# Altium PCB dalibor-display.PcbDoc
Units mm, origin at the board's own origin, x right, y up, seen from the top; angles counter-clockwise.
Board outline 120 x 75 mm, 2 copper layers (Top Layer, Bottom Layer), stack 1.471 mm thick; 22 components, 46 nets, 114 pads, 19 vias.
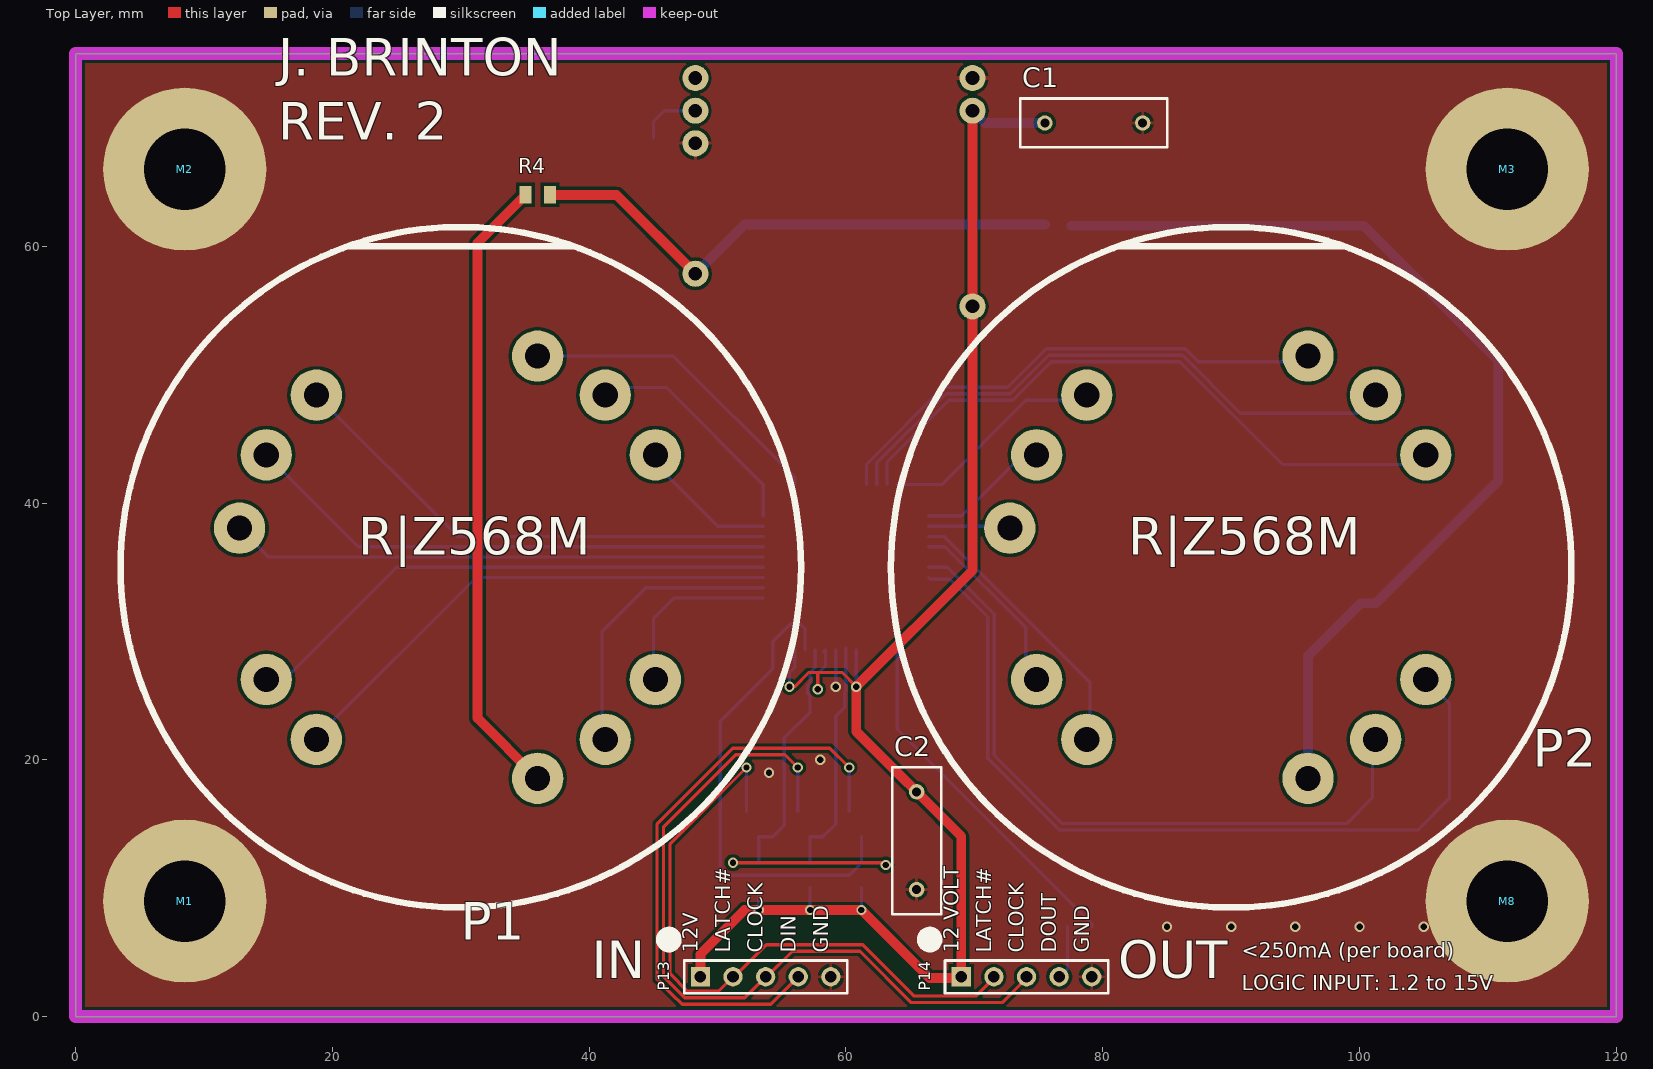
[diagram p0: Top Layer view]
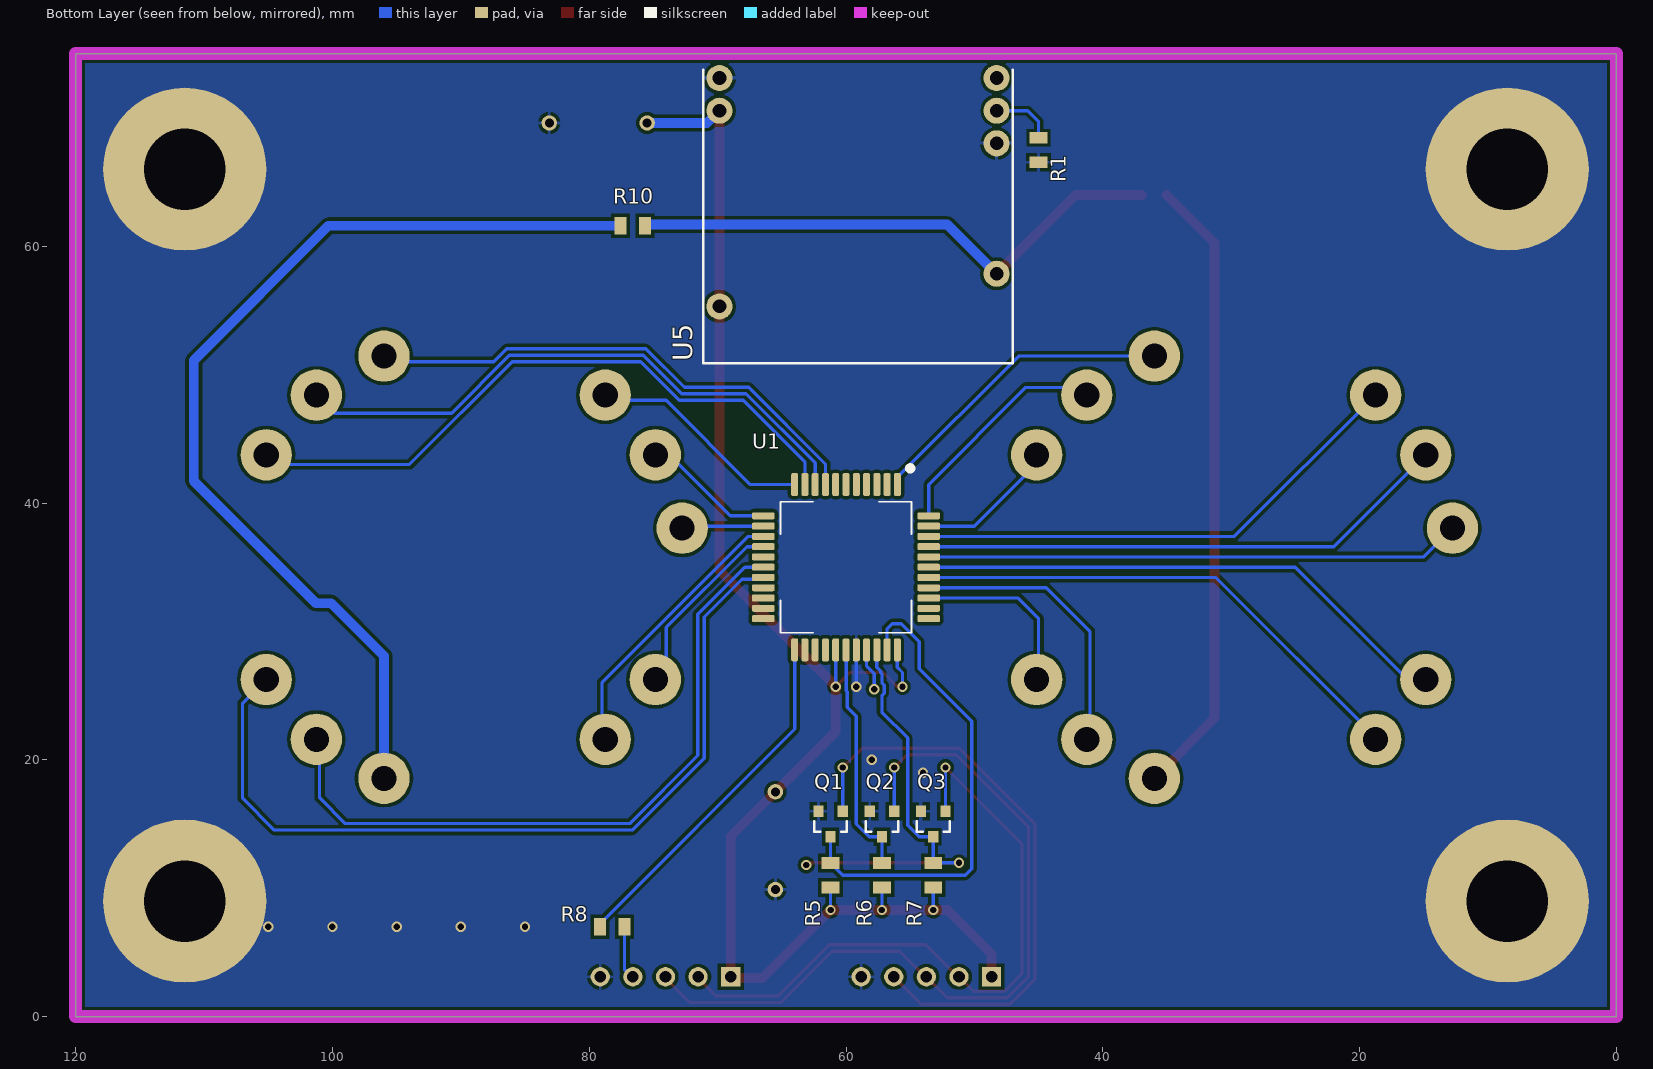
[diagram p1: Bottom Layer view, seen from below]
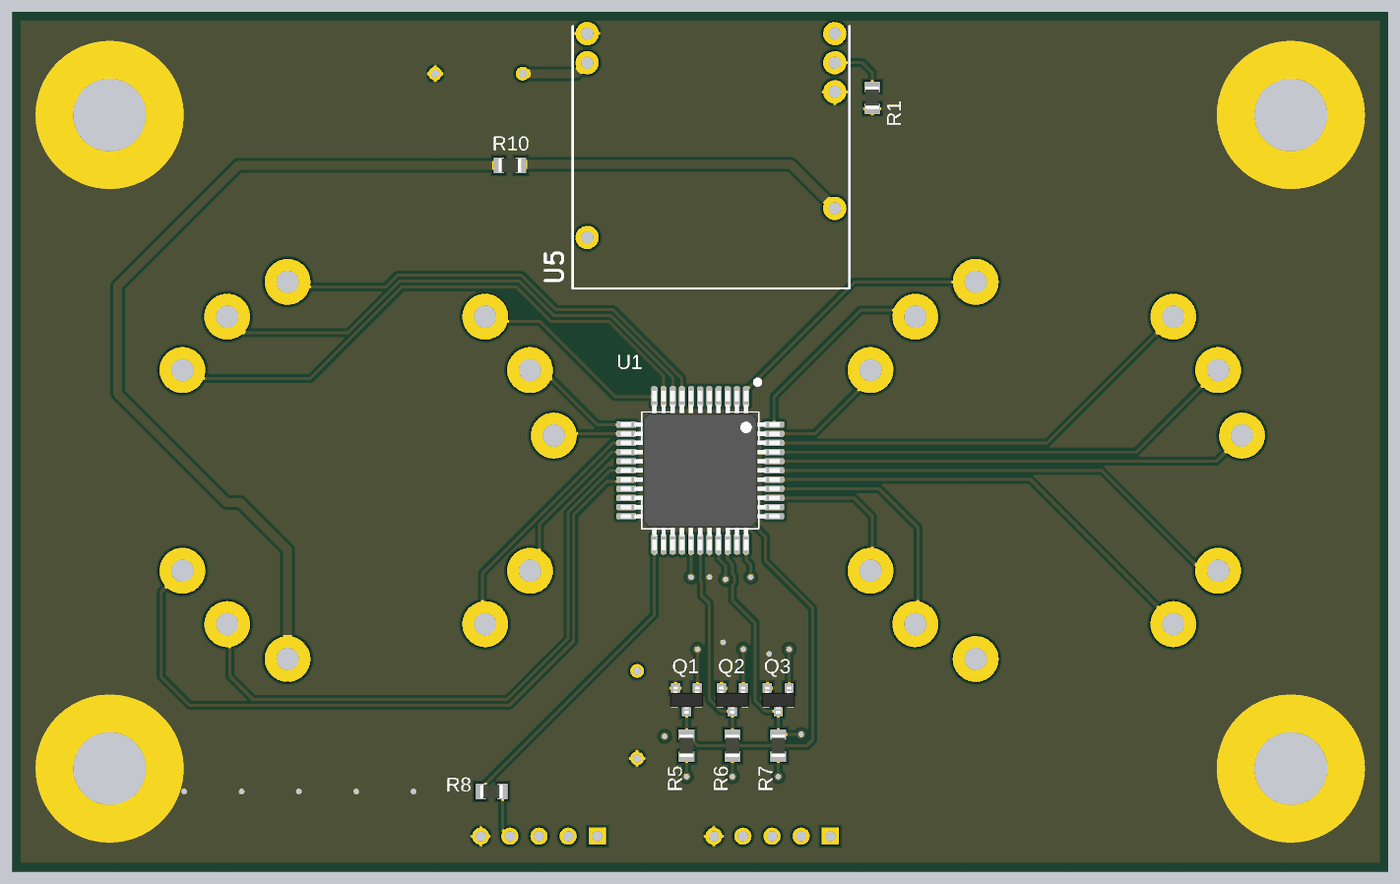
[diagram p2: 3D render of the assembled board from below, using the file's embedded part models]

## Layer stack, top to bottom
Top Solder: solder mask 0.0102, Solder Resist, Dk 3.5
Top Layer: signal copper 0.0356
Dielectric 1: dielectric 1.4, FR-4, Dk 4.8
Bottom Layer: signal copper 0.0356
Bottom Solder: solder mask 0.0102, Solder Resist, Dk 3.5

## Board outline
0,0 120,0 120,75 0,75

## Design rules (kind name [scope] priority, off if disabled: settings)
Clearance Clearance_solder_link [InComponent('SL*')] p1: gap=0.1 ignorepadtopadclearanceinfootprint=FALSE except(0: Arc-Hole Track-Hole SMDPad-Hole THPad-Hole Via-Hole Fill-Hole Poly-Hole Region-Hole Text-Hole)
Clearance Clearance_hv [All] p2 off: gap=0.762 ignorepadtopadclearanceinfootprint=FALSE except(0: Arc-Hole Track-Hole SMDPad-Hole THPad-Hole Via-Hole Fill-Hole Poly-Hole Region-Hole Text-Hole)
Clearance [All] p3: gap=0.254 ignorepadtopadclearanceinfootprint=FALSE except(0: Arc-Hole Track-Hole SMDPad-Hole THPad-Hole Via-Hole Fill-Hole Poly-Hole Region-Hole Text-Hole)
HoleSize [All] p1: absolutevalues=TRUE maxlimit=6.35 minlimit=0.025 maxpercent=80.000 minpercent=20.000
MinimumSolderMaskSliver [All] p1 off: minsoldermaskwidth=0.254
PolygonConnect PolygonConnect_Vias [IsVia or InComponent('M*')] p1: connectstyle=Direct reliefconductorwidth=0.254 reliefentries=4 polygonreliefangle="90 Angle" airgapwidth=0.254
PolygonConnect [All] p2: connectstyle=Relief reliefconductorwidth=0.254 reliefentries=4 polygonreliefangle="90 Angle" airgapwidth=0.254
RoutingVias [All] p1: holewidth=0.711 width=1.27 viastyle="Through Hole" minholewidth=0.711 minwidth=1.27 maxholewidth=0.711 maxwidth=1.27
SilkToSilkClearance [All] p1 off: silktosilkclearance=0.254
SilkToSolderMaskClearance [IsPad] p1 off: minsilkscreentomaskgap=0.254 clearancetoexposedcopper=TRUE
SolderMaskExpansion [All] p1: expansion=0.102
Width [All] p1: maxlimit=2.54 minlimit=0.254 preferedwidth=0.254
26 further rules are at their usual default settings.

## Classes and differential pairs
net class HV: N1_0 N1_1 N1_2 N1_3 N1_4 N1_5 N1_6 N1_7 N1_8 N1_9 N2_0 N2_1 N2_2 N2_3 N2_4 N2_5 N2_6 N2_7 N2_8 N2_9 N3_0 N3_1 N3_2 N3_3 N3_4 N3_5 N3_6 N3_7 N3_8 N3_9 NA_S1 NA_S2

## Components (designator, comment, footprint, x,y, rotation, side; value= is the part's Value field where it differs from the comment)
C1 "Cap" RAD-0.3 79.3,69.6 r180 top value=TBD
C2 "Cap" RAD-0.3 65.5,13.7 r90 top value=TBD
M1 "MOUNT" MOUNT1-4_20 8.5,9 r180 top
M2 "MOUNT" MOUNT1-4_20 8.5,66 r180 top
M3 "MOUNT" MOUNT1-4_20 111.5,66 r180 top
M8 "MOUNT" MOUNT1-4_20 111.5,9 r180 top
P1 "RZ568M" RZ568M 30,35 r180 top locked
P2 "RZ568M" RZ568M 90,35 r180 top locked
P13 "PEC06SBAN" HDR1X5 48.66,3.1 r0 top
P14 "PEC06SBAN" HDR1X5 68.98,3.1 r0 top
Q1 "ZXM61N03F" SOT23 61.2,15 r0 bottom
Q2 "ZXM61N03F" SOT23 57.2,15 r0 bottom
Q3 "ZXM61N03F" SOT23 53.2,15 r0 bottom
R1 "ERJ-6ENF4702V" 0805 45,67.5 r270 bottom value=47k
R4 "ERJ-6ENF4702V" 0805 36,64 r0 top value=47k
R5 "ERJ-6ENF4702V" 0805 61.2,11 r270 bottom value=47k
R6 "ERJ-6ENF4702V" 0805 57.2,11 r270 bottom value=47k
R7 "ERJ-6ENF4702V" 0805 53.2,11 r270 bottom value=47k
R8 "ERJ-6ENF4702V" 0805 78.2,7 r180 bottom value=47k
R10 "ERJ-6ENF4702V" 0805 76.6,61.6 r180 bottom value=47k
U1 "HV5622PG" QFP44P80_1390X1390X235L88X37N 60,35 r0 bottom
U5 "1364HVPS-H" 1364HVPS-H 59.065,62.935 r270 bottom

## Footprints (in the part's own frame and the unit in brackets; to place one, negate y for a bottom-side part, rotate by r counter-clockwise, add the part's x,y. Pads: shape width x height; smd on the part's side, far side on the other; paste and mask are expansions set on the pad)
0805 [mm] "SMD; Body 2 x 1.2 mm (LxW typ)"
  rect 0.92x1.38 smd: 1(-0.955,0) 2(0.955,0)
  body extent -1,-0.63 1,0.63, height 1.2
1364HVPS-H [mil] "High Voltage Power Supply"
  round 80 hole 42: E1(200,425) E2(-300,425) E3(-200,425) E4(-300,-425) E5(-400,-425) E6(-400,425) E7(300,-425)
  silkscreen extent -425,-475 475,475
HDR1X5 [mm] "Connector; Header; 5 Position"
  rect 1.5x1.5 hole 0.9: 1(0,0)
  round 1.5 hole 0.9: 2(2.54,0) 3(5.08,0) 4(7.62,0) 5(10.16,0)
  silkscreen extent -1.27,-1.27 11.43,1.27
MOUNT1-4_20 [mm] "1/4-20 mount"
  round 12.7 hole 6.35: 1(0,0)
QFP44P80_1390X1390X235L88X37N [mm] "Quad Flat Pack (QFP), 0.80 mm pitch; square, 11 pin X 11 pin, 10.00 mm L X 10.00 mm W X 2.35 mm H body"
  rrect49% 0.545x1.78 smd mask+0.05: 1(-4,-6.44) 2(-3.2,-6.44) 3(-2.4,-6.44) 4(-1.6,-6.44) 5(-0.8,-6.44) 6(0,-6.44) 7(0.8,-6.44) 8(1.6,-6.44) 9(2.4,-6.44) 10(3.2,-6.44) 11(4,-6.44) 23(4,6.44) 24(3.2,6.44) 25(2.4,6.44) 26(1.6,6.44) 27(0.8,6.44) 28(0,6.44) 29(-0.8,6.44) 30(-1.6,6.44) 31(-2.4,6.44) 32(-3.2,6.44) 33(-4,6.44)
  rrect49% 1.78x0.545 smd mask+0.05: 12(6.44,-4) 13(6.44,-3.2) 14(6.44,-2.4) 15(6.44,-1.6) 16(6.44,-0.8) 17(6.44,0) 18(6.44,0.8) 19(6.44,1.6) 20(6.44,2.4) 21(6.44,3.2) 22(6.44,4) 34(-6.44,4) 35(-6.44,3.2) 36(-6.44,2.4) 37(-6.44,1.6) 38(-6.44,0.8) 39(-6.44,0) 40(-6.44,-0.8) 41(-6.44,-1.6) 42(-6.44,-2.4) 43(-6.44,-3.2) 44(-6.44,-4)
  silkscreen extent -5.2,-7.9 5.1,5.1, body extent -6.95,-6.95 6.95,6.95, height 2.35
RAD-0.3 [mm] "Radial Cap, Thru-Hole; 2 Leads; 0.3 in Pin Spacing"
  round 1.2 hole 0.7: 1(-3.81,0) 2(3.81,0)
  silkscreen extent -5.71,-1.91 5.71,1.91
RZ568M [mm] "Nixie Tube Socket"
  round 4 hole 1.95: 0(-15.155,8.75) 1(-5.985,-16.445) 2(-15.155,-8.75) 3(11.249,13.406) 4(-11.249,-13.406) 5(17.234,-3.039) 6(-11.249,13.406) 7(15.155,8.75) 8(11.249,-13.406) 9(15.155,-8.75) A(-5.985,16.445)
  silkscreen extent -26.5,-26.5 26.5,26.5
SOT23 [mm] "SOT-23; 3 Leads; Body 3.0 x 2.5 mm, inc. leads (LxW max)"
  rect 0.8x0.9 smd: 1(-0.95,-1) 2(0.95,-1) 3(0,1)
  silkscreen extent -1.27,-0.2 1.28,0.6, body extent -1.46,-1.14 1.46,1.2, height 1

## Part data
C1 C2: "Capacitor"
P1 P2: "Nixie Tube Socket", Manufacturer="Glow Tube Research", Manufacturer P/N=RZ568M
P13 P14: "Header, 5-Pin, Right Angle, 0.1\" pitch", Manufacturer=Sullins, Manufacturer P/N=PEC06SBAN
Q1 Q2 Q3: library part BSH103, "N-Channel Enhancement Mode MOSFET transistor", Manufacturer=Zetex, Manufacturer P/N=ZXM61N03F
R1 R4 R5 R6 R7 R8 R10: library part RES, "Thick Film Resistor 47k +/-1% 0805", Manufacturer=Panasonic, Manufacturer P/N=ERJ-6ENF4702V
U1: "32-Channel Serial to Parallel Converter", Manufacturer=Microchip, Manufacturer P/N=HV5622PG
U5: "High Voltage Power Supply", Manufacturer="Taylor Electronics", Manufacturer P/N=1364HVPS-H

## Via types
v1: diameter 0.8, hole 0.5, Top Layer to Bottom Layer, tented both sides, 19 vias

## Nets (pads, with @x,y where several pads share a name; then routed paths per layer and width w, separated by ;. In a path a pad name is that pad's centre, name@x,y a point inside that pad or via, vN(x,y) a via of type N, cw(c..) or ccw(c..) an arc to the next point about the centre after c; other vN are vias at no path point)
CLK: Q2.3 R6.1 U1.28 | length 19.2
  Bottom Layer w0.254: R6.1@56.855,11.955 R6.1 ; R6.1@57.545,11.955 R6.1 ; U1.28@60,28.7 59.981,28.681 59.981,25.376 59.9,25.295 59.9,24.1 59.2,23.4 59.2,15 58.2,14 Q2.3 R6.1
CLK_LV: P13.3 P14.3 Q2.1 | length 61.2
  Top Layer w0.254: P13.3 52.101,1.461 47.442,1.461 46.653,2.25 46.65,2.25 45.792,3.108 45.792,14.792 51.4,20.4 55.25,20.4 v1(56.25,19.4) ; P13.3@53.79,3.05 55.832,5.092 61.09,5.092 65.09,1.092 72.152,1.092 P14.3@74.06,3
  Bottom Layer w0.254: Q2.1 v1(56.25,19.4)
DIN: Q1.3 R5.1 U1.32 | length 37.9
  Bottom Layer w0.254: U1.32 56.8,30.2 56.4,30.6 55.7,30.6 54.3,29.2 54.3,27.1 50.2,23 50.2,11.5 50.7,11 60.245,11 R5.1 Q1.3
DIN_LV: P13.4 Q1.1 | length 46.2
  Top Layer w0.254: P13.4 54.133,0.953 47.231,0.953 46.444,1.741 46.441,1.741 45.284,2.898 45.284,15.002 51.19,20.908 58.742,20.908 v1(60.25,19.4)
  Bottom Layer w0.254: Q1.1 v1(60.25,19.4)
DOUT: R8.1 U1.23 | length 27.8
  Bottom Layer w0.254: U1.23 64,22.4 79.155,7.245 R8.1
GND: C1.1 C2.1 M1.1 M2.1 M3.1 M8.1 P13.5 P14.5 Q1.2 Q2.2 Q3.2 R1.2 U1.29 U5.E3 U5.E5 | length 3.6
  Bottom Layer w0.254: v1(59.2,25.7) U1.29
  Bottom Layer w0.762: M8.1 M8.1@112,9.5
  other v1: 85,7 90,7 95,7 100,7 105,7 54,19 58,20
HV1: R4.2 R10.2 U5.E1 | length 42.7
  Top Layer w0.762: R4.2 42.125,64 U5.E1
  Bottom Layer w0.762: U5.E1 52.115,61.7 R10.2@75.5,61.7
LE#: Q3.3 R7.1 U1.31 | length 33.2
  Top Layer w0.254: v1(51.2,11.984) 62.924,11.984 v1(63.1,11.808)
  Bottom Layer w0.254: v1(51.2,11.984) 53.171,11.984 R7.1 Q3.3 54.3,14 55.2,14.9 55.2,21.7 57.2,23.7 57.2,24.995 57.019,25.177 57.019,25.823 57.2,26.004 57.2,26.7 57.292,26.792 57.292,26.91 57.6,27.218 U1.31
LE#_LV: P13.2 P14.2 Q3.1 | length 51.4
  Top Layer w0.254: P13.2 50.069,1.969 47.652,1.969 46.3,3.321 46.3,13.45 v1(52.25,19.4) ; P13.2@51.25,3.05 53.8,5.6 61.3,5.6 65.3,1.6 70.12,1.6 P14.2@71.52,3
  Bottom Layer w0.254: Q3.1 v1(52.25,19.4)
N1_0: P1.0 U1.36 | length 14
  Bottom Layer w0.254: P1.0 45,26.405 45,31 46.6,32.6 U1.36
N1_1: P1.1 U1.1 | length 24.5
  Bottom Layer w0.254: P1.1 46.555,51.445 56,42 U1.1
N1_2: P1.2 U1.43 | length 11.1
  Bottom Layer w0.254: P1.2 45.155,43.045 50,38.2 U1.43
N1_3: P1.3 U1.38 | length 40.1
  Bottom Layer w0.254: P1.3 18.751,21.751 31.2,34.2 U1.38
N1_4: P1.4 U1.44 | length 17.3
  Bottom Layer w0.254: P1.4@41.843,49 46,49 53.56,41.44 U1.44
N1_5: P1.5 U1.40 | length 41.7
  Bottom Layer w0.254: P1.5 15.005,35.8 U1.40
N1_6: P1.6 U1.37 | length 22.5
  Bottom Layer w0.254: P1.6 41,21.843 41,30 44.4,33.4 U1.37
N1_7: P1.7 U1.39 | length 42.3
  Bottom Layer w0.254: P1.7 16.25,26.25 25,35 U1.39
N1_8: P1.8 U1.42 | length 39.4
  Bottom Layer w0.254: P1.8 29.757,37.4 U1.42
N1_9: P1.9 U1.41 | length 41.7
  Bottom Layer w0.254: P1.9 21.995,36.6 U1.41
N2_0: P2.0 U1.18 | length 66.2
  Bottom Layer w0.254: U1.18 66.586,34.054 68.102,34.054 71.032,31.123 71.032,20.123 76.631,14.524 104.524,14.524 107,17 107,24.405 P2.0
N2_1: P2.1 U1.8 | length 39.1
  Bottom Layer w0.254: U1.8 61.6,43.037 67.579,49.016 72.579,49.016 75.579,52.016 86.421,52.016 87.437,51 P2.1@95,51
N2_2: P2.2 U1.10 | length 50.6
  Bottom Layer w0.254: U1.10 63.2,43.2 68,48 73,48 76,51 86,51 94,43 104.405,43 P2.2
N2_3: P2.3 U1.14 | length 21.8
  Bottom Layer w0.254: U1.14 67.629,37.4 79,26.029 79,21.843 P2.3
N2_4: P2.4 U1.9 | length 46.5
  Bottom Layer w0.254: U1.9 62.4,43.118 67.79,48.508 72.79,48.508 75.79,51.508 86.21,51.508 90.718,47 99.843,47 P2.4
N2_5: P2.5 U1.13 | length 6.4
  Bottom Layer w0.254: U1.13 72.605,38.2 P2.5
N2_6: P2.6 U1.17 | length 54.8
  Bottom Layer w0.254: U1.17 67.874,35 71.54,31.334 71.54,20.334 76.842,15.032 99,15.032 101,17.032 101,21.345 P2.6
N2_7: P2.7 U1.15 | length 14.6
  Bottom Layer w0.254: U1.15 67.711,36.6 74,30.311 74,27.095 P2.7
N2_8: P2.8 U1.11 | length 17.6
  Bottom Layer w0.254: U1.11 67.44,41.44 74,48 78.345,48 P2.8
N2_9: P2.9 U1.12 | length 10.4
  Bottom Layer w0.254: U1.12 69,39 73.75,43.75 P2.9
N3_0: U1.22
N3_1: U1.2
N3_2: U1.4
N3_3: U1.20
N3_4: U1.3
N3_5: U1.7
N3_6: U1.21
N3_7: U1.19
N3_8: U1.5
N3_9: U1.6
NA_S1: U1.16
NA_S2: U1.35
NetP1_A: P1.A R4.1 | length 49.7
  Top Layer w0.762: R4.1 31.3,60.255 31.3,23.24 P1.A P1.A@36.54,18
NetP2_A: P2.A R10.1 | length 77.8
  Top Layer w0.762: P2.A@95.43,18 P2.A
  Bottom Layer w0.762: R10.1 100.3,61.6 110.8,51.1 110.8,41.7 101.3,32.2 100.1,32.2 95.985,28.085 P2.A
NetP14_4: P14.4 R8.2 | length 4.3
  Bottom Layer w0.254: P14.4@76.6,3 77.245,3.645 R8.2
NetR1_1: R1.1 U5.E2 | length 4.9
  Bottom Layer w0.254: R1.1 45,69.7 45.855,70.555 U5.E2
V12: C1.2 C2.2 P13.1 P14.1 R5.2 R6.2 R7.2 U1.27 U1.30 U1.33 U5.E4 U5.E7 | length 128.6
  Top Layer w0.254: v1(55.6,25.7) 56,25.7 57.1,26.8 57.8,26.8 ; v1(57.8,25.5) 57.8,26.8 ; v1(60.8,25.7) 59.7,26.8 57.8,26.8
  Top Layer w0.762: P13.1@48.66,3 P13.1 48.66,4.86 52.1,8.3 v1(53.2,8.3) v1(57.2,8.3) v1(61.2,8.3) 66.5,3 68.98,3 P14.1 68.98,14.02 60.8,22.2 v1(60.8,25.7) 69.86,34.76 U5.E7 U5.E4
  Bottom Layer w0.254: v1(53.2,8.3) R7.2 ; v1(55.6,25.7) 55.6,26.8 56,27.2 U1.33 ; v1(57.2,8.3) R6.2 ; v1(57.8,25.5) 57.8,26.7 58.4,27.3 U1.30 U1.30@58.254,28.414 ; v1(60.8,25.7) U1.27 ; v1(61.2,8.3) R5.2
  Bottom Layer w0.762: U5.E4 70.815,69.6 C1.2
pads on no net: U1.24 U1.25 U1.26 U1.34 U5.E6

## Polygon pours and split planes (outlines as drawn)
GND on Bottom Layer "GND_B" (solid, remove dead copper, pour order 0): 0,0 120,0 120,75 1,75 0,75
GND on Top Layer "GND_T" (solid, remove dead copper, pour order 2): 0,0 120,0 120,75 1,75 0,75

## Keep-outs
Keep-Out Layer:
  the board outline again, w1

## Silkscreen, mask and mechanical layers (free items; w line width, h text height)
Top Overlay:
  circle w1: c66.52,6 r0.5
  circle w1: c46.2,6 r0.5
  text "J. BRINTON / REV. 2" at 15.8,67.3 h5
  text "R|Z568M" at 22,35 h5
  text "R|Z568M" at 82,35 h5
  text "12V" at 48.84,4.96 h2 r90
  text "LATCH#" at 51.38,4.96 h2 r90
  text "CLOCK" at 53.92,4.96 h2 r90
  text "DIN" at 56.46,4.96 h2 r90
  text "GND" at 59,4.96 h2 r90
  text "12 VOLT" at 69.16,4.96 h2 r90
  text "LATCH#" at 71.7,4.96 h2 r90
  text "CLOCK" at 74.24,4.96 h2 r90
  text "DOUT" at 76.78,4.96 h2 r90
  text "GND" at 79.32,4.96 h2 r90
  text "<250mA (per board)" at 90.81,4.21 h2
  text "IN" at 40.2,2 h5
  text "OUT" at 81.2,2 h5
  text "LOGIC INPUT: 1.2 to 15V" at 90.81,1.67 h2
Mechanical 1:
  the board outline again, w1
  text "FRONT" at 74.4,65.9 h5
Mechanical 2:
  the board outline again, w1